# Altium PCB Capybara.PcbDoc (part 5 of 5)
Units mil, origin at the board's own origin, x right, y up, seen from the top; angles counter-clockwise.
Board outline 2270 x 2270 mil, 4 copper layers (Top Layer, GND, Signal, Bottom Layer), stack 61.8 mil thick; 394 components, 234 nets, 1155 pads, 211 vias.
Unrouted connection lines stored in the file: 4.
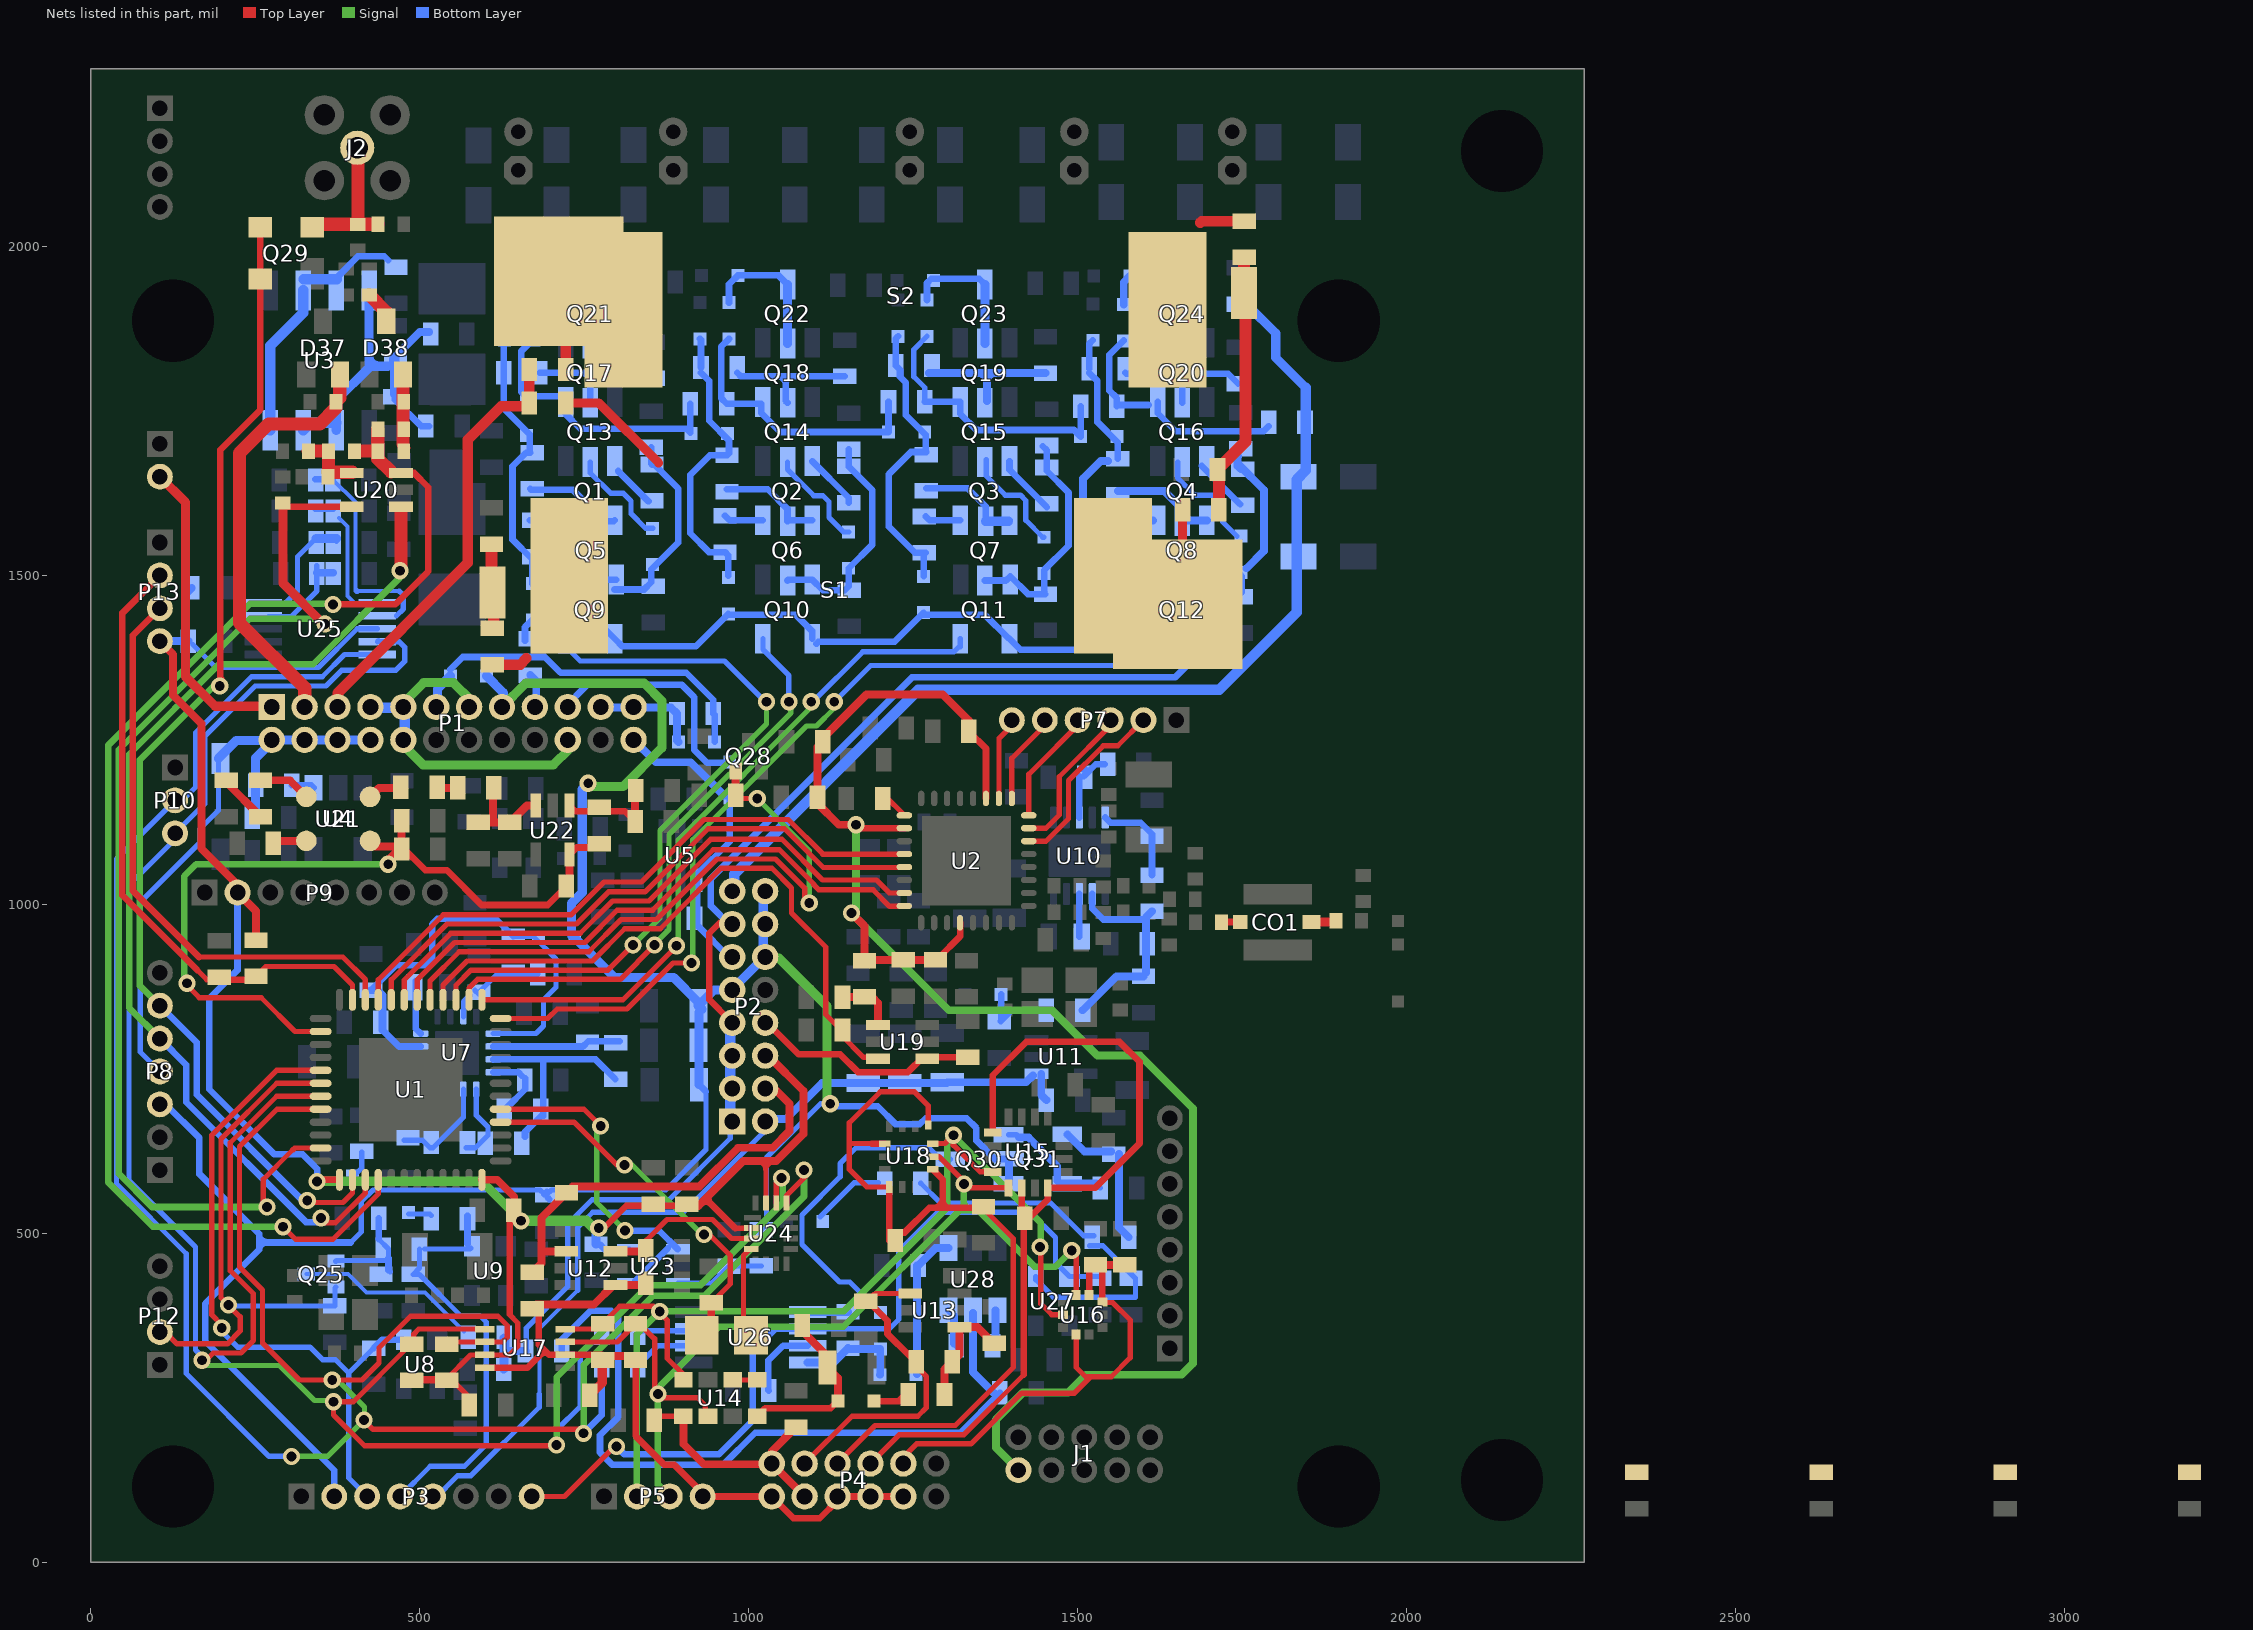
[diagram p5: the nets of this part, all layers, seen from the top]

## Via types
v1: diameter 26, hole 15, Top Layer to Bottom Layer, tented both sides, 209 vias
v2: diameter 26, hole 15, Top Layer to Bottom Layer, tented bottom, 2 vias

## Nets (pads, with @x,y where several pads share a name; then routed paths per layer and width w, separated by ;. In a path a pad name is that pad's centre, name@x,y a point inside that pad or via, vN(x,y) a via of type N, cw(c..) or ccw(c..) an arc to the next point about the centre after c; other vN are vias at no path point) (continued)
NetC97_1: C97.1 C98.1 D38.2 R100.2 | length 112.5
  Top Layer w10.42: R100.2@475.69,1689 R100.2@480.59,1693.91
  Top Layer w20.2: R100.2@474.59,1700.09 D38.2@474.59,1805.65
NetC99_2: C99.2 D38.3 | length 60.7
  Top Layer w10.42: D38.3@455,1884.35 D38.3@455,1894.31
  Top Layer w20.2: C99.2@423,1926.31 449,1900.31 D38.3@449,1886.35
NetC101_1: C101.1 R103.1 R104.2 U22.3 | length 139.2
  Top Layer w12: R103.1@589,1124.56 613,1124.56 ; R104.2@611.56,1165 611.56,1126 613,1124.56 ; U22.3@676.41,1150.4 662.84,1150.4 C101.1@637,1124.56 613,1124.56
NetC103_1: C103.1 U21.4 | length 52.6
  Top Layer w12: U21.4@424.43,1163.46 437.96,1177 C103.1@471.44,1177
NetC103_2: C103.2 R104.1 | length 29.9
  Top Layer w12: C103.2@526.56,1177 R104.1@556.44,1177
NetC106_2: C106.2 R105.1 | length 73.5
  Top Layer w12: C106.2@206,1185.44 R105.1@258,1133.44
NetC107_2: C107.2 R106.1 R107.2 U22.1 | length 157.4
  Top Layer w10: U22.1@727.59,1150.4 736.43,1141.56 811.88,1141.56 R107.2@827.44,1126 ; C107.2@827.44,1172 C107.2@828.44,1173
  Top Layer w12: R107.2@827.44,1126 C107.2@827.44,1172
NetC116_2: C116.2 Q31.1 R124.2 | length 209.9
  Bottom Layer w12: Q31.1@1484.29,650.4 1510.13,624.56 C116.2@1551,624.56 ; C116.2@1563,620.44 1563,508.56 R124.2@1577.56,494
NetC119_1: C119.1 U28.4 | length 52.9
  Bottom Layer w12: C119.1@1375.4,330.09 U28.4@1375.4,383
NetC119_2: C119.2 U28.6 | length 58.7
  Bottom Layer w10: U28.6@1303.6,383 U28.6@1312,374.6 ; C119.2@1312,332.69 C119.2@1315.44,329.24
  Bottom Layer w12: C119.2@1312,332.69 U28.6@1312,374.6
NetC120_2: C120.2 D40.1 U28.1 | length 223.4
  Bottom Layer w8: D40.1@1254.56,285 D40.1@1255.56,286
  Bottom Layer w12: D40.1@1255.56,286 C120.2@1255.56,451 ; C120.2@1257.56,451 1284.05,477.49 U28.1@1303.6,477.49
NetC121_2: C121.2 R130.2 U28.5 | length 1147.1
  Bottom Layer w8: C121.2@1372.56,257.44 C121.2@1381.88,257.44
  Bottom Layer w10: R130.2@715.8,321 715.8,338.8 759,382 791,382 802,371 802,221 774,193 774,167 793,148 961,148 1010,197 1321.44,197 C121.2@1381.88,257.44
  Bottom Layer w12: U28.5@1341,379 1341,289 C121.2@1372.56,257.44
NetCO1_1: CO1.1 R99.1 | length 37.1
  Top Layer w14: CO1.1@1855.23,973 R99.1@1892.31,973
NetCO1_2: CO1.2 L6.2 | length 28.3
  Top Layer w10.42: L6.2@1718.69,973 CO1.2@1746.96,973
NetD5_1: D5.1 Q1.3 | length 157.5
  Bottom Layer w8: Q1.3@759,1672.29 759,1656 790,1625 809.18,1625 821.18,1613 821.18,1593.82 843.44,1571.56 D5.1@854,1571.56
NetD6_1: D6.1 Q2.3 | length 157.7
  Bottom Layer w8: Q2.3@1059,1672.29 1059,1661 1099,1621 1113,1621 1122,1612 1122,1588 1144,1566 D6.1@1152,1566
NetD7_1: D7.1 Q4.3 | length 169.3
  Bottom Layer w8: Q4.3@1652,1672.29 1652,1648 1678,1622 1711,1622 1720,1613 1720,1581.56 D7.1@1742,1559.56
NetD8_1: D8.1 Q3.3 | length 169.4
  Bottom Layer w8: Q3.3@1361,1676.29 1361,1651 1390,1622 1413,1622 1421,1614 1421,1584 1447,1558 D8.1@1449,1558
NetD9_1: D9.1 D10.1 D17.2 Q17.2 R25.1 | length 429.5
  Bottom Layer w10: D9.1@663,1772.56 712.75,1772.56 Q17.2@721.6,1763.71 721.6,1745.4 744,1723 905.44,1723 911.44,1717 R25.1@911.44,1761 ; D9.1@666,1767.56 654,1779.56 654,1840.44 D17.2@672,1858.44
NetD11_1: D11.1 D18.2 Q18.2 R25.2 R26.1 | length 424.8
  Bottom Layer w10: D18.2@970,1859.44 958,1847.44 958,1769.56 R25.2@966.56,1761 1018.89,1761 1018.89,1747.11 1048,1718 D11.1@1212.44,1718 R26.1@1212.44,1764
NetD12_1: D12.1 D19.2 Q19.2 R26.2 R27.1 | length 430.1
  Bottom Layer w8: R26.2@1267.56,1764 1267.56,1785.44 1251,1802 1251,1843.44 D19.2@1271,1863.44
  Bottom Layer w10: R26.2@1267.56,1764 1267.85,1763.71 Q19.2@1321.6,1763.71 1321.6,1745.4 1346,1721 1494.44,1721 D12.1@1504.44,1711 R27.1@1504.44,1757
NetD17_1: D17.1 D21.1 Q17.3 Q21.3 | length 214.3
  Bottom Layer w10: D17.1@672,1913.56 672,1940.44 D21.1@685.56,1954 ; Q21.3@747.29,1954 Q21.3@759,1942.29
  Bottom Layer w14: D21.1@685.56,1954 Q21.3@747.29,1954 ; Q17.3@759,1852.29 Q21.3@759,1942.29
NetD18_1: D18.1 D22.1 Q18.3 Q22.3 | length 218.2
  Bottom Layer w10: D18.1@970,1914.56 970,1942.44 D22.1@983.56,1956 1045.29,1956 Q22.3@1059,1942.29
  Bottom Layer w14: Q18.3@1059,1852.29 Q22.3@1059,1942.29
NetD19_1: D19.1 D23.1 Q19.3 Q23.3 | length 210.2
  Bottom Layer w10: D19.1@1271,1918.56 1271,1944.44 1277.56,1951 1350.29,1951 Q23.3@1359,1942.29
  Bottom Layer w14: Q19.3@1359,1852.29 Q23.3@1359,1942.29
NetD20_1: D20.1 D24.1 Q20.3 Q24.3 | length 222.1
  Bottom Layer w12: D20.1@1570,1911.56 1570,1945.44 D24.1@1579.56,1955 1646.29,1955 Q24.3@1659,1942.29
  Bottom Layer w14: Q20.3@1659,1852.29 Q24.3@1659,1942.29
NetD20_2: D20.2 Q20.2 R27.2 R28.1 | length 361.8
  Bottom Layer w10: R27.2@1559.56,1757 1559.56,1769.44 1548,1781 1548,1835 D20.2@1570,1857 ; R27.2@1560.56,1759 1607.6,1759 ; Q20.2@1621.6,1763.71 1621.6,1746.4 1649,1719 1782.44,1719 R28.1@1790.44,1727
NetD32_1: D32.1 R74.1 | length 110.5
  Bottom Layer w8: D32.1@1108.56,525 1116,532.44 1116,532.53 1129.47,546 1129.56,546 1160.56,577 R74.1@1197.44,577
NetD33_1: D33.1 R73.1 | length 44.5
  Bottom Layer w8: D33.1@397.44,585 412,599.56 R73.1@412,623.44
NetD34_1: D34.1 R60.1 | length 35.5
  Bottom Layer w8: D34.1@483,529.44 515,529.44 R60.1@517.44,527
NetD35_1: D35.1 R84.1 R85.2 | length 116.1
  Bottom Layer w10: R85.2@1383,822.56 R85.2@1383.56,823.12 ; D35.1@1383.56,863 R85.2@1383.56,823.12 ; R84.1@1452.44,839 1399.44,839 R85.2@1383.56,823.12
NetD36_1: D36.1 R91.1 | length 57.7
  Top Layer w10: D36.1@1190.56,245 1228.44,245 R91.1@1242.44,259
NetD39_1: D39.1 Q30.3 | length 493.4
  Bottom Layer w8: D39.1@1200,379.56 1153.56,426 1138,426 1081,483 1081,528 1139,586 1139,606 1163,630 1274,630 1291.4,612.6 Q30.3@1306.42,612.6
NetFB2_2: FB2.2 U21.2 | length 51.5
  Top Layer w12: FB2.2@277.56,1093 281.09,1096.54 U21.2@327.57,1096.54
NetL1_2: L1.2 U7.16 | length 83.4
  Bottom Layer w10: L1.2@494,884 494,811 U7.16@501.35,803.65
NetL2_2: L2.2 U10.3 | length 64.9
  Bottom Layer w10: L2.2@1502.6,951 U10.3@1502.6,1015.87
NetL3_2: L3.2 U2.17 | length 42.9
  Top Layer w8: L3.2@1206.28,1165.72 U2.17@1236.61,1135.39
NetP7_2: P7.2 U2.6 | length 293.5
  Top Layer w8: U2.6@1425.59,1096.02 1451.81,1096.02 1486,1130.2 1486,1188 1539,1241 1561,1241 P7.2@1600,1280
  Top Layer w10: P7.2@1609,1272 P7.2@1609,1281
NetP7_3: P7.3 U2.7 | length 235.9
  Top Layer w8: U2.7@1425.59,1115.7 1451.7,1115.7 1472,1136 1472,1194 P7.3@1559,1281
NetP7_4: P7.4 U2.8 | length 180.2
  Top Layer w8: U2.8@1425.59,1135.39 1425.59,1197.59 P7.4@1509,1281
NetP7_5: P7.5 U2.9 | length 144.5
  Top Layer w8: U2.9@1400,1160.98 1400,1222 P7.5@1459,1281
NetP7_6: P7.6 U2.10 | length 131.9
  Top Layer w8: U2.10@1380.31,1160.98 1380.31,1252.31 P7.6@1409,1281
NetQ1_1: Q1.1 Q5.3 R5.1 | length 160.9
  Bottom Layer w10: R5.1@668,1631.44 669.44,1630 733,1630 761,1602 Q5.3@761,1582.29 794.98,1582.29 Q1.1@796.4,1583.71
NetQ1_2: Q1.2 R1.1 | length 54.7
  Bottom Layer w10: R1.1@667,1583.56 721.45,1583.56 Q1.2@721.6,1583.71
NetQ2_1: Q2.1 Q6.3 R6.1 | length 161.1
  Bottom Layer w10: R6.1@967,1631 1029,1631 1059,1601 Q6.3@1059,1582.29 1060.42,1583.71 Q2.1@1096.4,1583.71
NetQ2_2: Q2.2 R2.1 | length 60.4
  Bottom Layer w10: R2.1@964,1590.56 970.85,1583.71 Q2.2@1021.6,1583.71
NetQ3_1: Q3.1 Q7.3 R7.1 | length 161.1
  Bottom Layer w10: R7.1@1270,1632.44 1332.56,1632.44 1360,1605 Q7.3@1360,1582.29 ; Q3.1@1394.98,1582.29 Q3.1@1396.4,1583.71
  Bottom Layer w14: Q7.3@1360,1582.29 Q3.1@1394.98,1582.29
NetQ3_2: Q3.2 R3.1 | length 55
  Bottom Layer w10: R3.1@1269,1589.56 1274.85,1583.71 Q3.2@1321.6,1583.71
NetQ4_1: Q4.1 Q8.3 R8.1 | length 165.9
  Bottom Layer w12: R8.1@1561,1628 1632,1628 1659,1601 Q8.3@1659,1582.29 1660.42,1583.71 Q4.1@1696.4,1583.71
NetQ4_2: Q4.2 R4.1 | length 46.3
  Bottom Layer w12: R4.1@1568.56,1583 1613.89,1583 Q4.2@1614.6,1583.71
NetQ13_1: Q13.1 R9.1 | length 65.4
  Bottom Layer w10: Q13.1@801.4,1658.71 R9.1@847.67,1612.44
NetQ13_3: Q13.3 R13.1 R21.2 | length 265.1
  Bottom Layer w8: 743,1807 cw(c745,1792) 760,1794 cw(c772.5,1795.5) 771,1808
  Bottom Layer w10: R13.1@682.56,1808 846.44,1808 R21.2@855,1799.44 ; Q13.3@759,1762.29 759,1805 ; R21.2@851,1801.44 R21.2@853,1799.44
NetQ14_1: Q14.1 R10.1 | length 86.3
  Bottom Layer w10: Q14.1@1096.4,1673.71 1152,1618.11 R10.1@1152,1610.44
NetQ14_3: Q14.3 R14.1 R22.2 | length 253
  Bottom Layer w8: 1040,1802.44 cw(c1041.78,1788.22) 1056,1790 cw(c1070.72,1787.72) 1073,1802.44
  Bottom Layer w10: R14.1@982.56,1808 988.12,1802.44 1056,1802.44 ; Q14.3@1059,1762.29 1056,1765.29 1056,1802.44 ; R22.2@1146,1802.44 1056,1802.44
NetQ15_1: Q15.1 R11.1 | length 93.3
  Bottom Layer w10: Q15.1@1396.4,1673.71 1396.4,1660.48 R11.1@1453,1603.88
NetQ15_3: Q15.3 R15.1 R23.2 | length 277.1
  Bottom Layer w8: 1339,1806 cw(c1344.5,1788.5) 1362,1794 ; 1362,1793 cw(c1379.5,1789.5) 1383,1807
  Bottom Layer w12: R15.1@1274,1807.44 1360,1807.44 ; Q15.3@1362,1765 1362,1805.44 1360,1807.44 ; R23.2@1451,1807.44 1360,1807.44
NetQ16_1: Q16.1 R12.1 | length 82.6
  Bottom Layer w10: Q16.1@1688.4,1666.71 R12.1@1746.83,1608.28
NetQ16_3: Q16.3 R16.1 R24.2 | length 268.7
  Bottom Layer w8: 1643,1806 cw(c1645,1792) 1659,1794 cw(c1674,1791) 1677,1806
  Bottom Layer w10: R16.1@1572.56,1808 1574.12,1806.44 1659,1806.44 ; Q16.3@1659,1762.29 1659,1806.44 ; R24.2@1744,1791.44 1729,1806.44 1659,1806.44
NetQ25_1: Q25.1 R61.1 R63.2 R64.2 | length 170.5
  Bottom Layer w8: Q25.1@372.39,457.69 373.39,458.69 449.13,458.69 452.44,462 452.44,476 R63.2@437.56,490.88 ; R64.2@452.44,444.12 R64.2@455,441.56
  Bottom Layer w10: R63.2@437.56,490.88 R61.1@437.56,523 ; R64.2@452.44,444.12 R63.2@452.44,462
NetQ25_3: Q25.3 R59.1 | length 276.2
  Bottom Layer w6: Q25.3@327.5,438 391,438 419,410 508,410 R59.1@567.5,350.5
NetQ30_1: Q30.1 Q31.2 R125.2 | length 185.9
  Bottom Layer w8: Q30.1@1395,650 1407,650 Q30.1@1411,646 ; R125.2@1527.84,575.6 R125.2@1534.44,569
  Bottom Layer w12: Q30.1@1411,646 1425,646 1469,602 1469,580 1473.4,575.6 Q31.2@1484.29,575.6 R125.2@1527.84,575.6
NetR40_2: R40.2 U3.2 U3.3 U3.8 | length 379.7
  Bottom Layer w10: U3.3@374,1950.3 374,1953 406,1985 446,1985 R40.2@452,1979
  Bottom Layer w16: U3.8@273,1720.7 273,1849 323,1899 U3.2@323,1933.3 ; U3.2@324,1950.3 U3.3@374,1950.3
NetR41_1: R41.1 S2.1 | length 142
  Top Layer w16: S2.1@711,1952 S2.1@713.59,1949.41 ; S2.1@711.25,1947.06 721.56,1936.76 R41.1@721.56,1813
NetR42_1: R42.1 R45.2 S1.1 | length 335.4
  Top Layer w14: R42.1@721.56,1762 772,1762 863,1671 ; S1.1@1636.44,1453.23 1659.44,1476.23 R45.2@1659.44,1600
NetR43_1: R43.1 R45.1 R46.2 S2.2 | length 385.6
  Top Layer w18: R45.1@1714.56,1600 1714.56,1659 R46.2@1712.56,1661 1755,1703.44 S2.2@1755,1912.91 ; S2.2@1752.59,1929.32 1753,1929.73 R43.1@1753,1983.44
NetR43_2: R43.2 S2.3 | length 68.1
  Top Layer w16: 1686,2036 1688.56,2038.56 R43.2@1753,2038.56
NetR44_1: R44.1 R47.2 S1.2 | length 129.4
  Top Layer w18: R47.2@609,1547.44 609,1475.76 S1.2@610.85,1473.91 612.56,1472.2 R44.1@612.56,1419.56
NetR44_2: R44.2 S1.3 | length 56
  Top Layer w16: R44.2@610,1364.44 652.44,1364.44 662,1374
NetR48_2: R48.2 U4.1 | length 34.6
  Bottom Layer w10: R48.2@305.56,1181 334.84,1181 U4.1@338.6,1177.24
NetR55_1: R55.1 R57.2 R58.2 U7.3 | length 145.6
  Bottom Layer w8: U7.3@566.31,829.24 566.31,852.31 R55.1@576,862 ; R55.1@584,869.31 R55.1@589.63,863.69 ; R55.1@590,866.44 615,891.44 676.88,891.44 R57.2@679.44,894
NetR66_1: R66.1 R68.1 R70.1 U7.7 | length 328.7
  Bottom Layer w10: U7.7@611.63,764.24 U7.7@611.59,764.28 688,764.28 ; R70.1@660,647 660,653.94 684.06,678 687.56,678 687.56,763.83 688,764.28 ; R68.1@797,734.44 767.17,764.28 688,764.28
NetR66_2: R66.2 R67.1 U7.8 | length 102.1
  Bottom Layer w10: U7.8@611.59,744.59 649.97,744.59 R67.1@655,739.56 ; R66.2@632.44,691 660.44,719 R67.1@660.44,736
NetR68_2: R68.2 R69.1 U7.6 | length 195.7
  Bottom Layer w10: U7.6@611.87,784.24 U7.6@611.59,783.96 747.96,783.96 756,792 R68.2@803.56,792
NetR70_2: R70.2 R71.1 U7.9 | length 118.1
  Bottom Layer w8: R71.1@570.56,630 584.56,630 603.56,649 603.56,661.44 586,679 U7.9@586,719
NetR71_2: R71.2 R72.1 U7.10 | length 156.9
  Bottom Layer w8: R72.1@476,641.44 504,641.44 515.44,630 520,630 566.31,676.31 U7.10@566.31,719
NetR77_1: R77.1 R79.2 U10.8 | length 103.6
  Bottom Layer w10: U10.8@1502.6,1132.02 R77.1@1502.6,1195 ; R77.1@1509.56,1195 1527.56,1213 R79.2@1541.44,1213 ; R77.1@1509.56,1205 R77.1@1510.47,1205.91
NetR78_1: R78.1 R81.2 U10.10 | length 140.6
  Bottom Layer w10: U10.10@1541.97,1132.02 1549.98,1124 1595.87,1124 R81.2@1613.22,1106.66 ; R78.1@1613,1044.56 R81.2@1613,1103.44
NetR105_2: R105.2 U21.3 | length 80
  Top Layer w12: R105.2@258,1188.56 302.48,1188.56 U21.3@327.57,1163.46
NetR108_2: R108.2 R109.1 U23.3 | length 137.4
  Bottom Layer w8: U23.3@892.4,424.41 944.41,424.41 R109.1@970,450 970.44,450.44 R108.2@1019,450.44
NetR126_1: R126.1 U26.5 | length 61.3
  Bottom Layer w12: U26.5@1089.61,380.39 1150.63,380.39 R126.1@1150.8,380.56
NetR127_2: R127.2 U26.7 | length 115
  Bottom Layer w10: R127.2@1030.56,261 1030,261.56 1030,307 1052.2,329.2 U26.7@1089.61,329.2
NetR128_2: R128.2 U26.2 | length 97.4
  Bottom Layer w8: R128.2@831.56,298.8 861.96,329.2 U26.2@916.39,329.2
NetR129_2: R129.2 U26.3 | length 78.9
  Bottom Layer w8: R129.2@831.56,347.8 835.76,352 U26.3@908.76,352
NetU14_3: U14.3 U14.4 | length 37.4
  Top Layer w8: U14.3@975.47,277.13 U14.4@1012.87,277.13
OPEN_0: Q12.2 U1.12 | length 1372.9
  Top Layer w8: U1.12@623,826.43 694.43,826.43 708.97,840.97 814.77,840.97 884.8,911 912,911 912,906 v1@909,903
  Signal w8: v1@912,911 915,914 915,1098 1088,1271 1103,1271 1130,1298 v1(1130,1308)
  Bottom Layer w8: v1@1125,1310 v1@1128.54,1310 ; v1@1129.08,1310 v1@1128.54,1310 ; Q12.2@1621.6,1403.71 1621.6,1393.6 1591,1363 1185.54,1363 1130.54,1308 v1@1128.54,1310
  other v1: 913,911
OPEN_1: Q11.2 U1.13 | length 1077.6
  Top Layer w8: U1.13@594.46,854.97 808.97,854.97 888,934 v1@887,935
  Signal w8: v1(890,937) 893,940 893,1098 1095,1300 v1(1095,1308)
  Bottom Layer w8: v1@1096.24,1306.76 1173.47,1384 1312,1384 1321.6,1393.6 Q11.2@1321.6,1403.71 Q11.2@1321.6,1391.6 ; v1@1099,1311 1099,1302 v1@1100,1301
OPEN_2: Q10.2 U1.14 | length 903
  Top Layer w8: U1.14@574.77,854.97 574.77,872.77 588,886 805,886 v1(857,938)
  Signal w8: v1(857,938) 856,939 879,962 879,1106 1064,1291 v1@1064,1308
  Bottom Layer w8: Q10.2@1021.6,1396.4 Q10.2@1021.6,1403.71 1021.6,1387.4 1061,1348 v1(1061,1308)
OPEN_3: Q9.2 U1.15 | length 1146.6
  Top Layer w8: U1.15@555.09,854.97 555.09,877.09 578,900 786,900 v1(824,938) v1@833,938
  Signal w8: v1@824,929 v1@833,938 ; v1(824,938) 865,979 865,1112 1027,1274 v1(1027,1308)
  Bottom Layer w8: Q9.2@721.6,1403.71 721.6,1392.4 744,1370 963,1370 1027,1306 v1(1027,1308)
PHOTO_SENSE: Q27.2 R93.2 U1.4 | length 571.4
  Top Layer w8: U1.4@623,668.94 734.58,668.94 799.53,604 v1@805,604 ; v1@932,495 943,495 972,466 972,423 943.44,394.44 R93.2@943,394.44
  Top Layer w12: Q27.2@928.6,345 943,359.4 R93.2@943,394.44
  Signal w8: v1@806.5,605.5 821.5,605.5 v1@932,495
  other v1: 932,498 811,604
PHOTO_SW: Q27.1 U24.4 | length 141.8
  Top Layer w8: Q27.1@1003.4,345 992,356.4 992,466 1002.38,476.38 U24.4@1003.8,476.38
RAD_IO0: U1.19 U2.23 | length 912.9
  Top Layer w8: U1.19@476.35,854.97 476.35,885.15 547.2,956 744,956 793,1005 848.2,1005 942,1098.8 942.2,1099 1050.4,1099 1112.4,1037 1194,1037 1213.72,1017.28 U2.23@1236.61,1017.28
RAD_IO1: U1.18 U2.24 | length 889.1
  Top Layer w8: U1.18@496.03,854.97 496.03,885.03 553,942 751,942 800,991 854,991 946,1083 1046.6,1083 1099,1030.6 1099,1029.6 1106.6,1022 1189.2,1022 1214.2,997 1236.02,997 U2.24@1236.61,997.59
RAD_RST: Q28.1 R98.2 U1.17 | length 988.3
  Top Layer w8: U1.17@515.72,854.97 515.72,883.72 560,928 756.8,928 805.8,977 859.8,977 951.8,1069 1040.8,1069 1085,1024.8 1085,1006 1092,999 v1(1092,1002) ; R98.2@980,1166 985,1161 v1(1013,1161) ; Q28.1@980,1202.24 Q28.1@980.31,1202.56
  Top Layer w12: R98.2@980,1166 Q28.1@980,1202.24
  Signal w8: v1(1013,1161) 1092,1082 v1(1092,1002)
RAD_RX: U1.21 U2.20 | length 952.8
  Top Layer w8: U1.21@436.98,854.97 437,885.4 535.6,984 730,984 780,1034 837,1034 932,1129 1059.99,1129 1112.66,1076.33 U2.20@1236.61,1076.33
RAD_SW: R96.2 U1.16 U19.3 | length 961.8
  Top Layer w8: U1.16@535.4,854.97 535.4,877.4 572,914 762.6,914 811.6,963 865.6,963 957.6,1055 1035,1055 1065,1025 1065,987 1117,935 1117,832.56 R96.2@1140.56,809 ; R96.2@1141,801 1174.59,767.41 U19.3@1203.6,767.41
RAD_TX: U1.20 U2.21 | length 930.1
  Top Layer w8: U1.20@456.66,854.97 456.66,885.26 541.4,970 738,970 787,1019 842.4,1019 938.4,1115 1054.2,1115 1113.2,1056 1235.97,1056 U2.21@1236.61,1056.65
RF_ANT: C95.2 J2.1 L8.1 Q29.2 | length 220.5
  Top Layer w10.42: C95.2@436,2033.69 C95.2@436.31,2034
  Top Layer w20.2: Q29.2@336.37,2033.69 L8.1@406,2033.69 C95.2@436,2033.69 ; J2.1@405,2160 406,2159 L8.1@406,2040
RF_BITLINE_LPF: C100.1 R101.1 R102.1 U20.4 | length 101.4
  Top Layer w10.42: U20.4@397.19,1657 U20.4@398.6,1655.59
  Top Layer w20.2: C100.1@330.69,1689 R101.1@361.31,1689 361.31,1657.63 360.69,1657 U20.4@397.19,1657
RF_RX: P8.5 U1.39 U20.1 | length 1582.6
  Top Layer w8: v1@352,517 353,516 372,516 417.29,561.29 U1.39@417.29,581.35
  Top Layer w20.2: v1(470,1507) 471.4,1508.4 471.4,1596
  Signal w8: v1@344,517 v1@352,517
  Signal w10: P8.5@105,796 58.31,842.69 58.31,1228.26 195.06,1365 338,1365 470,1497 v1(470,1507)
  Bottom Layer w10: P8.5@105,796 145,756 145,699.06 327.06,517 v1@352,517
  other v1: 350,523
RF_RX_BITLINE: C97.2 R100.1 R101.2 U1.40 U20.3 | length 2044.1
  Top Layer w8: v1(292,510) 311,491 368,491 436.98,559.98 U1.40@436.98,581.35
  Top Layer w10: v1(368,1456) 463,1456 513,1506 513,1634 491.41,1655.59 U20.3@471.4,1655.59
  Top Layer w20.2: R101.2@400.69,1689 R100.1@436.31,1689 ; C97.2@436.31,1722 R100.1@436.31,1689 ; U20.3@456.37,1657.37 436.31,1677.43 R100.1@436.31,1689
  Signal w10: v1(292,510) 94,510 26.31,577.69 26.31,1241.51 241.8,1457 v1@368,1457
RF_RX_EN: C96.1 U1.35 U20.5 | length 1753.2
  Top Layer w8: v1@262,540 262,582 307,627 307.53,627 310.1,629.57 U1.35@349.38,629.57
  Top Layer w10.42: C96.1@292.91,1604.41 U20.5@396.6,1604.41 U20.5@398.6,1604.41
  Top Layer w14: C96.1@292,1610.31 292,1488 v1@355,1425
  Signal w10: v1(268,540) 93,540 42.31,590.69 42.31,1234.88 241.43,1434 v1@356,1434
  other v1: 356,1426
RF_TX: P8.6 Q29.3 Q29.4 U1.38 | length 1757.7
  Top Layer w8: v1@331,547 383.2,547 397.61,561.41 U1.38@397.61,581.35
  Top Layer w10: v1@198,1343 196.9,1344.1 196.9,1690.9 257.63,1751.63 Q29.3@257.63,2029.37
  Signal w10: P8.6@105,846 74.31,876.69 74.31,1219.43 190.88,1336 v1@197,1336
  Bottom Layer w10: P8.6@105,846 161,790 161,711 325,547 v1@331,547
  other v1: 329,550 196,1332
RST_AP: C114.1 P13.2 R114.1 U1.23 | length 948.2
  Top Layer w8: 161.85,900 176.41,885.44 C114.1@189,885.44 ; R114.1@251,890.44 266,905.44 369.56,905.44 397.61,877.39 U1.23@397.61,854.97
  Top Layer w10: P13.2@105,1500 48,1443 48,1013.85 161.85,900 ; C114.1@189,885.44 245,885.44 R114.1@246,884.44
S_SCL: P5.3 R94.1 U14.7 U15.1 U16.2 U17.3 U18.13 | length 1571.9
  Top Layer w8: U17.3@721.02,334.84 800.28,334.84 831,365.56 857,339.56 v1@857,250 ; v1@862,250 922,250 934,238 U14.7@934,228 ; U18.13@1279.63,616.71 1289.29,616.71 1327,579 v1(1327,575) 1332.94,569.06 U15.1@1395,569.06 ; v1(1491,474) 1497.76,467.24 U16.2@1497.76,406.22
  Signal w8: 1322,537.37 ccw(c1317.33,544.11) 1325.53,544.02
  Signal w10: P5.3@880,100 862,118 v1(862,256) 862,265 955,358 1143.79,358 1321.23,535.44 1327,535.44 ; 1327,549 ccw(c1340.28,548.72) 1340,535.44 ; v1(1327,575) 1327,535.44 ; v1(1491,474) 1466,449 1435.06,449 1348.62,535.44 1327,535.44
S_SDA: P5.2 R95.1 U14.1 U15.16 U16.4 U17.4 U18.14 | length 1665.9
  Top Layer w8: U17.4@720.5,354 U17.4@721.02,354.53 766.97,354.53 778,365.56 780.56,365.56 804,389 855,389 876,368 876,310 899.87,286.13 U14.1@900.67,286.13 ; U18.14@1279.63,636.39 1298.39,636.39 v1(1311,649) 1311,634 1351.53,593.47 U15.16@1371,593.47 ; v1@1443.7,475.3 1443,474.6 1444,473.6 1444,393 1460.8,376.2 U16.4@1477.58,376.2
  Signal w8: P5.2@830,105 P5.2@835,100
  Signal w10: P5.2@830,105 830,346.57 v1(864.72,381.28) 1144.28,381.28 1302,539 1302,640 v1(1311,649) 1443.7,516.3 v1@1443.7,475.3
  other v1: 1442.7,479.3
SC_COM: R34.2 R35.1 R38.2 R39.1 U3.4 U3.6 U3.7 | length 548.7
  Bottom Layer w8: 425,1835 ccw(c439,1835) 439,1821
  Bottom Layer w10: R39.1@462,1775.56 R39.1@462,1771.56 462,1767 502,1727 R35.1@514.44,1727
  Bottom Layer w12: R38.2@459,1824.44 459,1829 500,1870 R34.2@514.44,1870
  Bottom Layer w14: U3.6@373,1732 U3.6@373,1720.7 373,1766 423,1816 ; U3.4@423,1926.3 423,1818 R38.2@451.44,1818 ; R39.1@462,1775.56 R38.2@462,1829
  Bottom Layer w16: U3.7@323,1720.7 334.3,1732 U3.6@373,1732
SCL: P10.2 R110.1 R128.1 U1.32 U17.6 U24.13 U25.10 | length 3951.7
  Top Layer w8: U1.32@349.38,688.63 282.83,688.63 226,631.8 226,449 261,414 261,333.47 317.47,277 v1(367,277) 412.2,277 438,302.8 438,326 486,374 618.97,374 633,359.97 633,342 625.84,334.84 U17.6@598.98,334.84 543.28,334.84 R110.1@541,332.56 ; v1(415,216) 429,202 v1@749,202 ; U24.13@1057.62,546 1057.62,557.62 v1@1085,585
  Signal w8: v1(305,161) 360,161 v1(415,216) 416,217 416,236 375,277 v1(367,277)
  Signal w10: v1(749,196) 749,299.51 854.78,405.28 933.28,405.28 1084,556 v1@1084,599
  Bottom Layer w8: v1(305,161) 271,161 145,287 145,469 39,575 39,1069 P10.2@128,1158 139,1158 159,1178 159,1260.8 244.2,1346 351.8,1346 385.43,1379.63 U25.10@435.61,1379.63
  Bottom Layer w10: v1(749,196) 776.44,223.44 R128.1@776.44,298.8
  other v1: 1084,596
SDA: P10.3 R111.1 R129.1 U1.31 U17.5 U24.14 U25.9 | length 3769.5
  Top Layer w8: v1@167,305 167,299 186,318 228,318 247,337 247,408.2 212,443.2 212,637.6 282.71,708.31 U1.31@349.38,708.31 ; R111.1@481,326 399,244 v1(369,244) 369,224 416,177 707,177 v1(708,178) ; R111.1@491,330.56 491,347 498.53,354.53 U17.5@598.98,354.53 ; U24.14@1041.87,546 1041.87,576.87 v1@1052,587
  Signal w8: v1@169,299 287,299 340,246 367,246 v1(369,244)
  Signal w10: v1(708,178) 708,281.14 848.15,421.28 926.66,421.28 1052,546.63 v1@1052,587
  Bottom Layer w8: v1@169,299 169,312.57 159,322.57 159,479 58,580 58,1029 128,1099 P10.3@128,1108 173,1153 173,1255 250,1332 357.6,1332 381.6,1356 464,1356 477,1369 477,1391 468.69,1399.31 U25.9@435.61,1399.31 U25.9@437.3,1401 ; v1(708,178) 708,201 744,237 744,315.16 776.44,347.6 R129.1@776.44,347.8
  other v1: 169,307 1050,584
SENSE_SW: R90.2 U12.3 U24.3 | length 249.1
  Top Layer w8: R90.2@843.85,472.59 844.44,472 844.44,489.44 876,521 945,521 973.87,492.13 U24.3@1003.8,492.13
  Top Layer w12: U12.3@797.4,472.59 R90.2@843.85,472.59
SUPPLY_BQ: D26.2 D29.1 P1.11 R50.1 | length 555.3
  Bottom Layer w10: 546.44,1357 565.44,1376 690,1376 714,1352 905,1352 946,1311 946,1290.12 R50.1@946.12,1290 948.12,1288 D29.1@948.12,1247
  Bottom Layer w14: P1.11@527,1299 527,1327.56 D26.2@546.44,1347
SUPPLY_BQ_IN: D29.2 P1.21 P1.23 R50.2 | length 172.9
  Bottom Layer w10: P1.23@831,1305 P1.23@836,1300
  Bottom Layer w12: P1.21@777,1299 827,1299 882,1299 R50.2@891,1290 891,1249 D29.2@893,1247 ; P1.21@783,1303 P1.21@786,1300
SUPPLY_HRV: D27.1 P1.19 | length 368.8
  Bottom Layer w10: P1.19@719,1298 755,1334 898,1334 917,1315 917,1235 937,1215 967.44,1215 D27.1@974,1221.56
TEST_AP: P13.3 U1.22 | length 886.4
  Top Layer w8: 164.48,920 278,920 383,920 417.29,885.71 U1.22@417.29,854.97
  Top Layer w10: P13.3@105,1450 64,1409 64,1020.48 164.48,920
VAR_THR: C118.2 P3.8 U26.6 U27.2 | length 1243.5
  Top Layer w8: P3.8@670,100 720,100 796,176 v1(799,176)
  Bottom Layer w8: v1@802,180 v1@802.5,179.5 ; U26.6@1089.61,354.8 1089.82,355 1214,355 1228,369 1228,473 1287,532 1428,532 1466.4,493.6 1466.4,455.59 U27.2@1487.59,434.4 1535.16,434.4 C118.2@1538,431.56
  Bottom Layer w10: v1(799,176) 811,164 954.37,164 1006,215.63 1006,320 1040.8,354.8 U26.6@1089.61,354.8
VAR_THR_EN: C117.2 R74.2 R124.1 U27.1 | length 582.6
  Bottom Layer w8: R74.2@1261.56,576 1291.56,546 1459,546 1508.72,496.28 R124.1@1524.72,496.28 ; U27.1@1436.41,434.4 1436.41,429.59 1463,403 1588,403 1588,431.56 1538.56,481 R124.1@1518,481
VB1_DIV: R116.1 R120.1 U25.4 | length 152.6
  Bottom Layer w8: U25.4@270.39,1437.69 304.69,1437.69 343.56,1476.56 R120.1@343.56,1515
  Bottom Layer w12: R120.1@343.56,1504 R116.1@368.44,1504
VB2_DIV: R117.1 R121.1 U25.5 | length 180.5
  Bottom Layer w6: R117.1@373.44,1550.56 R117.1@373.44,1556
  Bottom Layer w8: U25.5@270.39,1457.37 295.37,1457.37 314,1476 314,1528.44 R121.1@342.56,1557
  Bottom Layer w14: R121.1@342.56,1556 R117.1@373.44,1556
VB3_DIV: R118.1 R122.1 U25.6 | length 200.3
  Bottom Layer w6: R118.1@377,1587 390,1574 390,1469 400.63,1458.37 U25.6@435.61,1458.37
  Bottom Layer w10: R122.1@341.56,1601 R118.1@368.44,1601
VB4_DIV: R119.1 R123.1 U25.7 | length 323.2
  Bottom Layer w6: R119.1@367.44,1646 402,1611.44 402,1478 404,1476 469,1476
  Bottom Layer w8: 403,1478 ccw(c405,1478) 405,1476 ; 464.69,1438.69 475,1449 475,1470 469,1476
  Bottom Layer w10: R123.1@341.56,1646 R119.1@367.44,1646
VBANK: C29.2 C30.2 C31.2 D25.1 D26.1 P1.15 P2.9 P2.12 P2.14 P2.16 P3.2 P8.3 Q30.2 Q31.3 R62.1 R108.1 | length 3948.6
  Signal w14: P1.15@625,1300 661,1336 841,1336 868,1309 868,1238 809,1179 v1@763,1179 ; P2.12@1022,918 1046,918 1119,845 v1@1119,697
  Bottom Layer w8: 255.79,474 cw(c271.39,470.39) 275,486 ; 255.79,497 ccw(c269.39,501.61) 269.99,487.25 ; 395,486 411,502 411,548 429,566 682.56,566 689.28,559.28 R62.1@695,553.56 ; R62.1@693,558.56 700.44,566 873.8,566 935,627.2 C31.2@935,715.4 ; R108.1@1019,505.56 1027,513.56 1027,615 1109,697 v1@1119,697
  Bottom Layer w10: P8.3@105,696 114,696 165,645 165,590 255.79,499.21 255.79,475 174,393.21 174,335.94 370,139.94 P3.2@370,100 ; 255.79,486 395,486 ; R62.1@689.28,559.28 R62.1@693,563 ; R62.1@695,553.56 696.78,551.78 R62.1@697,552 ; C31.2@924.4,726 C31.2@935,715.4 ; C29.2@924.4,835.8 C29.2@929,840.4 ; P2.9@970,870 P2.9@972,872 ; v1@1119,693 1196,693 1223,666 1260,666 1269,675 1331,675 1346,660 1346,641 1374,613 Q31.3@1395.71,613 ; Q30.2@1395,575.2 Q30.2@1395.71,575.91
  Bottom Layer w12: Q30.2@1395.71,575.91 Q31.3@1395.71,613
  Bottom Layer w14: D26.1@601.56,1347 627,1321.56 P1.15@627,1299 ; D25.1@730.56,953 730.56,1001.56 747,1018 747,1175 v1(756,1184) ; D25.1@735.56,949 795.56,889 885.77,889 923.4,851.37 C29.2@923.4,846 ; C31.2@924.4,726 C29.2@924.4,835.8 ; C29.2@929,840.4 C29.2@923.4,846 ; P2.9@972,868 P2.12@1022,918 ; P2.9@972,870 970,870 947.4,870 C29.2@923.4,846 ; P2.12@1022,920 P2.16@1022,1020
  other v1: 1124,697
VBANK_DIV_IN: U1.5 U23.1 U23.4 | length 504
  Top Layer w8: U1.5@623,688.63 749.37,688.63 v1(775,663)
  Signal w8: v1@769,660 769,547 v1(812,504)
  Bottom Layer w10: v1(812,504) 863.99,504 U23.1@892.4,475.59 ; U23.4@827.65,422 827.65,427.65 U23.1@877,477
VBANK_OK: P12.2 Q25.2 R65.2 U1.30 | length 828.8
  Top Layer w8: P12.2@105,350 113,350 131,332 207.53,332 227,351.47 227,373 v1(209,391) 198,402 198,643.4 282.6,728 U1.30@349.38,728
  Bottom Layer w8: v1@218,391 v1(209,391) 210.44,389.56 R65.2@371,389.56 371,416.93 Q25.2@372.39,418.31
VBOOST: C46.2 R76.1 R78.2 R84.2 U10.2 | length 322.6
  Bottom Layer w10: U10.2@1522.28,1015.87 1522.28,993.72 1539,977 1600.56,977 R78.2@1603.56,980
  Bottom Layer w12: R84.2@1507.56,839 1559.12,890.56 R76.1@1600,890.56 ; R76.1@1603.56,896.12 1603.56,980 R78.2@1613,989.44
VBOOST_OK: C39.2 P3.3 U1.29 U8.1 | length 1032.5
  Top Layer w8: v1@199,351 199,361 184,376 184,649.2 282.48,747.69 U1.29@349.38,747.69
  Bottom Layer w8: v1@199,351 223,327 333,327 352,308 371.56,308 392,287.56 ; P3.3@420,100 392,128 392,287.56 ; C39.2@430,325.56 392,287.56
  Bottom Layer w10: C39.2@430,325.56 442.84,338.4 U8.1@474.41,338.4
  other v1: 199,356
VCAP: C1.1 C2.1 P2.15 R28.2 R32.2 | length 1558.7
  Bottom Layer w14: R32.2@1759,1910 1801,1868 1801,1831 1846.56,1785.44
  Bottom Layer w16: P2.15@978,1015 978,1046 1258,1326 1715,1326 1832.72,1443.72 1832.72,1645.72 1846.56,1659.56 1846.56,1785.44
VCAP_IN: C28.2 D27.2 P1.24 P2.11 U5.1 | length 466.2
  Bottom Layer w10: D27.2@971.2,1161.44 971.2,1095.2 921.59,1045.59 U5.1@921.59,1036.6 921.59,968.41 P2.11@972,918
  Bottom Layer w12: P1.24@822,1253 859,1216 911.96,1216 962.58,1165.38 D27.2@967,1165.38
VCAP_OK: C43.2 P3.4 R60.2 R63.1 U9.1 | length 646.4
  Bottom Layer w8: P3.4@470,100 516,146 568,146 601,179 601,365 592,374 563,374 499.44,437.56 C43.2@490,437.56 499.56,447.12 R63.1@499.56,476 ; R63.1@507.56,476 576.01,476 U9.1@577.41,477.4
  Bottom Layer w10: U9.1@572.56,484.25 R60.2@572.56,527
VDD: C51.2 C52.2 C53.2 P2.2 P3.5 R75.2 U11.1 | length 1350.8
  Bottom Layer w6: 681.67,255.67 682.24,256.24 682.24,355.24 740,413
  Bottom Layer w8: P3.5@523,97 557.68,131.68 577.68,131.68 681.67,235.67 681.67,255.67 ; 740,413 740,509 763,532 901,532 1022,653 P2.2@1022,668
  Bottom Layer w12: P2.2@1022,674 1057,674 1111.6,728.6 C51.2@1174,728.6 C53.2@1237,728.6 1301,728.6 C52.2@1302,729.6 1421.6,729.6 U11.1@1432,740 ; U11.1@1444.6,742.41 1444.6,710.31 R75.2@1452.44,702.47
VDD_APDS: C59.2 P4.9 P4.12 R92.2 U14.8 | length 364.8
  Top Layer w8: C59.2@866.54,222.02 U14.8@900.67,222.02
  Top Layer w12: U14.8@900.67,222.02 900.67,179.98 931.64,149 P4.12@1035,149 ; R92.2@1072,205.44 1035,168.44 P4.12@1035,150 P4.9@1085,100
VDD_APDS_LED: C60.2 C61.1 D36.2 U14.5 | length 269.5
  Top Layer w10: U14.5@1012.87,222.02 1024.86,234 1124.44,234 D36.2@1135.44,245 ; C60.2@1081.44,351.56 C60.2@1081.44,360 ; C61.1@1116,317 1116,309 1119.6,305.4 C61.1@1119.6,296
  Top Layer w12: C60.2@1081.44,351.56 C61.1@1116,317 ; C61.1@1119.6,296 1135.44,280.16 D36.2@1135.44,245
VDD_APDS_LED_IN: C58.2 R88.2 R91.2 U13.1 | length 172.2
  Top Layer w12: R91.2@1297.56,255 1297.56,293 R88.2@1309.56,305 1320.4,315.84 U13.1@1320.4,357.41 1347.59,357.41 C58.2@1371,334
VDD_APDS_LED_SUP: C55.2 P4.10 R88.1 U13.4 | length 486.9
  Top Layer w8: P4.10@1085,150 1157,222 1257,222 1270,235 1270,282.44 1255.44,297 R88.1@1255.44,313 ; C55.2@1190,405.56 1193.03,408.59 U13.4@1245.6,408.59
  Top Layer w10: C55.2@1190,405.56 1190,388 1211,367 1211,347 1245,313 R88.1@1255.44,313
VDD_HMC: C64.1 P4.6 U15.2 U15.4 U15.13 | length 1276.8
  Top Layer w8: P4.6@1185,150 1229,194 1327,194 1418,285
  Top Layer w10: U15.13@1371,653 1371,740.24 1421.76,791 1563.74,791 1594,760.74 1594,636.56 1526.5,569.06 U15.4@1454.53,569.06 1454.53,551.21 C64.1@1430,526.69 ; U15.2@1415,569.06 1415,540 1428.31,526.69 1418,526.69 1418,285
VDD_LOAD: D1.1 D2.1 D3.1 D4.1 JU2.1 JU2.2 P1.17 P2.1 P2.3 P2.5 P2.7 P2.13 Q9.1 Q10.1 Q11.1 Q12.1 R56.2 R59.2 R130.1 | length 3262.6
  Top Layer w10: P2.7@972,822 972,823.21 940,855.21 940,956 956,972 P2.13@972,972
  Bottom Layer w8: R130.1@660.69,321 662,322.31 662,356 725,419 725,514 762,551 878.6,551 972,644.4 P2.1@972,670
  Bottom Layer w10: JU2.2@660,1400.56 660,1421.44 D1.1@671,1432.44 678.56,1440 760.11,1440 Q9.1@796.4,1403.71 808.11,1392 919.56,1392 D2.1@969,1441.44 ; D2.1@969,1440 1072,1440 1096.4,1415.6 Q10.1@1096.4,1403.71 ; P2.13@972,968 942.5,997.5 942.5,1039.5 1248,1345 1648,1345 1696.4,1393.4 Q12.1@1696.4,1403.71 ; Q10.1@1103,1396 1106,1399 1221.56,1399 D3.1@1266,1443.44 ; D3.1@1266,1440 1359.31,1440 Q11.1@1394,1405.31 ; Q11.1@1396.4,1403.71 1413.11,1387 1505.6,1387 D4.1@1561,1442.4 ; D4.1@1561,1440 1664,1440 Q12.1@1701,1403
  Bottom Layer w12: R130.1@660.69,321 630.56,321 ; JU2.1@668,1348.44 677,1339.44 P1.17@677,1299 ; 630.56,321 630.56,340 R59.2@628.56,342 627.56,341 R56.2@627.56,293 628.56,294 628.56,319 630.56,321
  Bottom Layer w16: P2.1@972,672 P2.7@972,822
VDD_LPS: C62.1 C63.1 P4.4 U16.1 U16.6 U16.10 | length 749
  Top Layer w8: P4.4@1235,150 1235,160 1255,180 1337.8,180 1414.8,257 1495,257 1518,280 1518,282 ; U16.6@1497.76,346.18 1497.76,296.24 1512,282 1518,282 ; U16.10@1537.62,395.89 1538.5,395 1553.2,395 1580,368.2 1580,311 1551,282 1518,282
  Top Layer w10: U16.1@1517.44,406.22 C63.1@1517.44,450.18 ; U16.10@1537.62,395.89 C63.1@1537.62,448
  Top Layer w12: C63.1@1529.2,451.94 C62.1@1576.3,451.94
VDD_LSM: C67.1 C68.1 P4.8 U18.1 U18.5 U18.8 U18.12 | length 1302.3
  Top Layer w8: P4.8@1132,161 1145,161 1192,208 1314,208 1402,296 1402,492 C68.1@1355.22,538.78 ; 1153,636.39 1187.39,636.39 ; U18.8@1213.69,570.45 1179.55,570.45 1153,597 1153,668 1200,715 1252,715 1272.74,694.26 U18.1@1272.74,664.94 ; 1274.78,538.78 ccw(c1277.78,556) 1295,553 ccw(c1308.11,551.89) 1307,538.78
  Top Layer w10: 1187.39,636.39 U18.5@1206.8,636.39 ; C67.1@1213.69,489 U18.8@1213.69,570.45 ; C67.1@1224.44,501 1237,501 1274.78,538.78 1295,538.78 ; U18.12@1279.63,597.02 1295,581.65 1295,538.78 ; C68.1@1355.22,538.78 1295,538.78
VDD_MCU: C70.2 C112.1 C113.1 C115.2 P2.6 P9.2 P13.4 R110.2 R111.2 R112.2 R113.2 R114.2 R115.2 U1.37 U1.48 U17.7 U23.5 U24.2 U24.15 U25.8 | length 3339.2
  Top Layer w6: P2.6@1015,772 P2.6@1016,771
  Top Layer w8: R111.2@490,277.44 R111.2@492,275.44 ; R110.2@540.22,278.22 577.16,315.16 U17.7@598.98,315.16 636.16,315.16 649,328 649,363.77 637,375.77 ; R110.2@550,276 C70.2@572,254 ; 637,411 638,410 ; R112.2@923.44,541.44 cw(c934.5,532.94) 943,544 cw(c952.5,552.5) 944,562 ; 979.34,507.87 U24.2@1003.8,507.87 ; 1014,609 cw(c1014,597) 1026,597 cw(c1040.34,595.5) 1041.84,609.84 ; U24.15@1026.13,546 1026.13,607.97
  Top Layer w10: v1(344,579) 346.35,581.35 U1.37@377.92,581.35 ; 637,377.19 637,411 637,526.44 C113.1@643.56,533 ; v1@776,504 814,542 R112.2@902,542 ; 935.61,551.61 979.34,507.87
  Top Layer w12: P13.4@105,1400 125,1380 125,1318 168,1275 168,1085 223,1030 P9.2@223,1018 251,990 R114.2@251,945.56 ; R111.2@490,277.44 R110.2@541,277.44 ; U1.48@594.46,581.35 617.65,581.35 643.56,555.44 C113.1@643.56,533 ; R112.2@902,541.44 923.44,541.44 991.84,609.84 1041.84,609.84 1083,651 1083,716.64 1031.64,768 P2.6@1022,768
  Signal w14: v1(344,579) 594,579 v1(654,519)
  Signal w16: v1(654,519) 753,519 v1@768,504
  Bottom Layer w8: R115.2@155.44,1394.56 190,1360 346,1360 405,1419 U25.8@435.61,1419
  Bottom Layer w10: P9.2@223,1018 223,900 180,857 180,719 279,620 322,620 344,598 v1(344,579) ; C112.1@773,483.56 781.97,474.59 U23.5@818.6,474.59
  Bottom Layer w12: P13.4@106,1399 P13.4@105,1400 R115.2@148.44,1400 144,1404.44 144,1471.56 C115.2@153.44,1481
  Bottom Layer w14: C112.1@768,483.56 768,504 v1(772,508)
VDD_MIC: C102.2 C104.2 C105.2 R106.2 U1.26 U21.1 U22.5 | length 1233.8
  Top Layer w8: v1@145,878 165,858 259,858 310.26,806.74 U1.26@349.38,806.74
  Top Layer w10: C105.2@472.44,1088 508.44,1052 541,1052 594,999 694.56,999 C102.2@722.56,1027 ; U22.5@727.59,1075.6 738.43,1086.44 R106.2@777,1086.44
  Top Layer w12: U21.1@424.43,1096.54 432.96,1088 C105.2@472.44,1088 ; v1@447,1061 446.56,1061 446,1061.56 C105.2@472.44,1088 ; C104.2@472.44,1132 C105.2@472.44,1088 ; C102.2@727.59,1032.03 U22.5@727.59,1075.6
  Signal w10: v1@145,878 142,881 142,1043 160,1061 438,1061
  other v1: 146,880 452,1061
Vdd_pot: D39.2 D40.2 R126.2 U26.8 | length 159.5
  Bottom Layer w12: U26.8@1089.61,303.61 1128.98,303.61 R126.2@1150.8,325.44 1151.8,324.44 D39.2@1200,324.44 1200,285.56 D40.2@1199.44,285
VDD_RAD: C73.2 C74.2 C75.2 C76.2 FB1.2 J1.1 R97.2 U2.11 U2.18 U2.28 | length 2495.4
  Top Layer w10: v1(1163,1121) 1168.3,1115.7 U2.18@1236.61,1115.7 ; C73.2@1288,918 1321.26,951.26 U2.28@1321.26,972 ; C76.2@1334.56,1263 1360.63,1236.93 U2.11@1360.63,1160.98
  Top Layer w12: R97.2@1112.56,1247 1104.56,1239 C75.2@1104.56,1163 1104.56,1153.44 1137,1121 v1(1163,1121) ; R97.2@1117.56,1247 1117.56,1257.56 1179,1319 1295,1319 1334.56,1279.44 C76.2@1334.56,1263 ; v1(1156,987) 1176,967 FB1.2@1176,914.56 ; FB1.2@1182.44,915.56 C74.2@1229,915.56 ; C74.2@1234,920.56 C74.2@1229,915.56 ; C73.2@1288,918 1285.56,915.56 C73.2@1284,915.56 C74.2@1235,915.56 C74.2@1229,915.56
  Signal w12: v1@1163,1119 1163,994 v1(1156,987) 1304,839 1461,839 1530,770 1595,770 1675,690 1675,302.24 1657.76,285 1512.7,285 1485.7,258 1417,258 1376,217 1376,174 J1.1@1410,140
VDD_RAD_FLT: C72.2 FB1.1 U19.1 | length 82.4
  Top Layer w12: C72.2@1140.56,859 1175.56,859 FB1.1@1176,859.44 ; FB1.1@1188,854.44 FB1.1@1189,855.44 ; FB1.1@1188,858.44 1196.6,849.84 U19.1@1196.6,816.59
VDD_RAD_SUP: C71.2 P2.8 U19.4 | length 359.2
  Top Layer w10: P2.8@1015,822 1019.4,817.6 1030.4,817.6 1076,772 1139,772 1166,745 1242,745 1264.41,767.41 C71.2@1333,767.44
VDD_SEN: C57.2 C69.2 P4.3 P4.5 P4.7 P4.11 P5.4 R87.2 R94.2 R95.2 U12.1 U17.2 U17.8 | length 1177.4
  Top Layer w8: R87.2@671,385.44 R87.2@677.06,391.5 ; 681,331 cw(c672,322) 681,313 cw(c690,306.16) 696.84,315.16 ; U12.1@794.41,421.41 U12.1@797.4,421.41
  Top Layer w10: U17.8@598.98,295.47 663.47,295.47 690,322 ; R87.2@679.44,377 681,375.44 681,331 690,322 ; R95.2@777.44,315.16 U17.2@721.02,315.16 696.84,315.16 690,322 ; U12.1@795.4,423.41 U12.1@797.49,423.31 ; R94.2@828,307.44 828,192 872,148 887,148 935,100 P4.11@1035,100 1068,67 1108,67 1135,94 P4.7@1135,100 P4.5@1185,100 P4.3@1235,100
  Top Layer w12: R87.2@677.06,391.5 764.5,391.5 U12.1@794.41,421.41 ; R95.2@784,313.44 R94.2@828,313.44 ; U12.1@797.4,421.41 838.85,421.41 C57.2@843.44,426
  Top Layer w14: C69.2@758.56,254 777.44,272.88 R95.2@777.44,307.44
VDD_SENSE_SUP: C56.2 P2.4 R87.1 U12.4 | length 646.1
  Top Layer w12: R87.1@671,440.56 685,454.56 685,472 ; U12.4@722.6,472.59 685.59,472.59 685,472 ; P2.4@1025.4,720.6 1038.4,720.6 1062,697 1062,655.66 1036.34,630 984,630 925,571 732.44,571 C56.2@723,561.56 685,523.56 685,472
VDD_SW_0: D4.2 D12.2 D16.2 R4.2 R8.2 R16.2 | length 427.4
  Bottom Layer w10: R16.2@1517.44,1808 1530,1795.44 1530,1733 1561,1702 R8.2@1561,1677.56 ; R16.2@1517.44,1814 1517.44,1851.88 D16.2@1523,1857.44
  Bottom Layer w12: R8.2@1546,1674 1535,1674 1508,1647 1508,1560 1538.56,1529.44 R4.2@1560,1529.44 1561,1528.44 D4.2@1561,1497.52
VDD_SW_1: D3.2 D11.2 D15.2 R3.2 R7.2 R15.2 | length 457.1
  Bottom Layer w10: D15.2@1227,1863.44 1223.44,1859.88 R15.2@1223.44,1819 1230,1812.44 1230,1802 1236,1796 1236,1795.79 1239,1792.79 1239,1743.44 1269,1713.44 1269,1688.56 1270,1687.56 1246.56,1687.56 1213,1654 1213,1574 1252.56,1534.44 1269,1534.44 1266,1531.44 D3.2@1266,1498.56
VDD_SW_2: D2.2 D10.2 D14.2 R2.2 R6.2 R14.2 | length 448.1
  Bottom Layer w10: D14.2@926,1859.44 927.44,1858 R14.2@927.44,1816 ; R14.2@927.44,1808 940,1795.44 940,1735 970,1705 970,1685.56 R6.2@967,1682.56 941,1682.56 911,1652.56 911,1564 939.56,1535.44 R2.2@964,1535.44 969,1530.44 D2.2@969,1499.56
VDD_SW_3: D1.2 D9.2 D13.2 R1.2 R5.2 R13.2 | length 415.2
  Bottom Layer w10: D13.2@627,1858.44 627.44,1858 R13.2@627.44,1808 627.44,1754 667,1714.44 667,1687.56 668,1686.56 661.56,1686.56 641,1666 641,1554.44 671,1524.44 D1.2@671,1487.56
VHarvest: D28.2 P1.2 P1.4 P1.6 P1.8 P8.4 R48.1 R49.2 | length 932.6
  Bottom Layer w8: P8.4@105,746 75,776 75,1003 166,1094 166,1115 194,1143 D28.2@194,1221.83 ; 253,1250 P1.2@275,1250
  Bottom Layer w14: D28.2@194,1221.83 221.17,1249 277,1249 250.44,1222.44 R48.1@250.44,1181 250.44,1134 R49.2@248.44,1132 ; P1.2@286,1250 P1.8@436,1250
VHarvest_EXT: P1.1 P11.2 | length 471.6
  Top Layer w14: P11.2@105,1650 144,1611 144,1346 189,1301 274,1301 P1.1@275,1300 ; P1.1@285,1301 P1.1@286,1300
VHarvest_RF: C93.1 D37.2 P1.3 | length 664
  Top Layer w10.42: D37.2@372.69,1799.74 D37.2@378.59,1805.65
  Top Layer w20.2: P1.3@325,1300 325,1329 225.9,1428.1 225.9,1685.9 270,1730 348,1730 372.69,1754.69 C93.1@372.69,1764 378.59,1769.91 D37.2@378.59,1805.65
VHarvest_SOL: P1.5 R41.2 R42.2 | length 652
  Top Layer w16: P1.5@375,1300 375,1321 573,1519 573,1706 624,1757 666.44,1757 666.44,1805 R41.2@667.44,1806
VIN: P1.7 P1.9 P1.10 P1.13 P1.20 | length 537.3
  Signal w14: P1.10@477,1249 477,1240 505,1212 703,1212 727,1236 P1.20@727,1249 ; P1.9@477,1299 477,1308 506,1337 551,1337 577,1311 P1.13@577,1299
  Bottom Layer w16: P1.7@427,1299 477,1299 P1.10@477,1249
VLTCH_0: C25.2 D7.2 Q8.1 Q12.3 R12.2 R20.2 R132.2 | length 340.5
  Bottom Layer w12: Q12.3@1653,1495.29 1653.42,1495.71 1712.85,1495.71 1741,1467.56 1748,1474.56 D7.2@1748,1498.44 ; 1744,1680.56 1743,1681.56 1743,1666.56 R12.2@1748,1661.56 ; R12.2@1745.22,1667.78 1783,1630 1783,1537 D7.2@1756.87,1510.87
VLTCH_1: C24.2 D8.2 Q7.1 Q11.3 R11.2 R19.2 R135.2 | length 363.1
  Bottom Layer w10: Q11.3@1359,1492.29 1390.98,1492.29 1397.4,1498.71 1424.55,1471.56 C24.2@1451,1471.56 1449,1473.56 1449,1508 1486,1545 1486,1626 1453,1659 1453,1690.44 R19.2@1447,1696.44
VLTCH_2: C23.2 D6.2 Q6.1 Q10.3 R10.2 R18.2 R134.2 | length 340.5
  Bottom Layer w10: Q10.3@1059,1492.29 1060.42,1493.71 Q6.1@1096.4,1493.71 1112.55,1477.56 1146,1477.56 1152,1483.56 D6.2@1152,1510.88 1188,1546.88 1188,1629.56 R10.2@1152,1665.56 R18.2@1152,1691.44
VLTCH_3: C22.2 D5.2 Q5.1 Q9.3 R9.2 R17.2 R133.2 | length 344.2
  Bottom Layer w10: Q9.3@759,1492.29 760.42,1493.71 Q5.1@798.4,1493.71 ; Q5.1@796,1478.56 841,1478.56 852,1489.56 852,1509 893,1550 893,1632 R9.2@852,1673 ; R17.2@852,1694.44 R9.2@852,1673 ; R9.2@853,1668.56 852,1669.56 R9.2@852,1673
VSTOR: C34.2 C35.2 D25.2 R58.1 U7.5 U7.15 | length 714.4
  Bottom Layer w8: U7.5@611.59,803.65 676.65,803.65 688,815 688,855 707,874 707,917 672.44,951.56 R58.1@642,951.56
  Bottom Layer w10: C34.2@426,869.44 464,907.44 508.44,907.44 519,918 519,970 527,978 615.56,978 R58.1@642,951.56 ; C35.2@443.56,809 468.6,783.96 U7.15@501.35,783.96
  Bottom Layer w12: C34.2@426,869.44 436,869.44 443.56,861.88 C35.2@443.56,809
pads on no net: J1.7 U2.3 U2.22 U2.25 U2.26 U2.27 U4.4 U4.5 U5.6 U6.3 U8.3 U9.3 U11.3 U12.6 U13.6 U15.3 U15.5 U15.6 U15.7 U15.14 U18.10 U18.11 U19.6 U27.3

## Polygon pours and split planes (outlines as drawn)
GND on GND "GND" (solid, pour order 18): 0,2270 1978,2270 1978,0 0,0
GND on Top Layer "GND" (solid, pour order 14): 509.63,2252.87 586.97,2252.87 599,2252.87 599,1462 509.63,1462
GND on Top Layer "GND" (solid, pour order 4): 1977.95,20 1609,20 1609,1309.86 1757,1491.84 1757,1807 1977.94,1807
GND on Top Layer "GND" (solid, pour order 12): 247,2255 511,2254 511,2071 224,2071 224,1579.79 20,1579.79 20,2254 21,2255
GND on Top Layer "GND" (solid, pour order 10): 584,2255 1930,2255 1930,2065 584,2065

## Keep-outs
Keep-Out Layer:
  the board outline again, w32

## Other copper
Top Layer:
  rectangle net GND: 1866,808 1978,955.07
  rectangle net GND: 1542,901 1616.99,965
  pour cut-out: 1939,948 1899,948 1855.96,991.04 1939,991.04
  pour cut-out: 1574,1213 1651.64,1213 1651.64,1075 1574,1075

## Silkscreen, mask and mechanical layers (free items; w line width, h text height)
Top Overlay:
  drawing of 3044 lines, arcs and shapes, not listed
  text "BNK>BPS" at 593,2212 h22 r270
  text "IN>BQ" at 559,2209 h22 r270
  text "BQ>CIN" at 806,2209 h22 r270
  text "IN>CIN" at 731,2205 h22 r270
  text "BQ>BP" at 768,2205 h22 r270
  text "LD>BPE" at 698,2204 h22 r270
  text "B1" at 21,2199 h22
  text "B2" at 20,2152.25 h22
  text "B3" at 20,2095.03 h22
  text "B4" at 20,2045.03 h22
  text "CAPybara v2.0" at 2109,1927 h40 r270
  text "Abstract Lab / ER AC BL 2018" at 1908,1796 h32 r270
  text "http://intermittent.systems" at 1858,1793 h28 r270
  text "GD" at 22,1693 h22
  text "VE" at 20,1613 h22
  text "GD" at 15,1538 h22
  text "RS" at 16,1489 h22
  text "BNK<BQ" at 506,1472 h22 r270
  text "TS" at 15,1439 h22
  text "IN-IN" at 464.69,1438.69 h22 r270
  text "IN<H" at 415,1431 h22 r270
  text "EXT" at 256,1409 h22 r270
  text "SOL" at 363,1402 h22 r270
  text "VD" at 17,1389 h22
  text "RF" at 310,1385 h22 r270
  text "GND" at 1665,1236 h22 r270
  text "2" at 1506,1235 h22 r270
  text "0" at 1605,1235 h22 r270
  text "3" at 1452,1233 h22 r270
  text "1" at 1549,1232 h22 r270
  text "4" at 1402,1231 h22 r270
  text "GND" at 23,1200 h22
  text "SCL" at 24,1149 h22
  text "SDA" at 23,1094 h22
  text "GND" at 60,1000 h22 r270
  text "VDD" at 93,1000 h22 r270
  text "CAP>BNK" at 786,998 h22
  text "TX" at 418,966 h22 r270
  text "BQO" at 515,966 h22 r270
  text "AX1" at 322,965 h22 r270
  text "AX0" at 370,963 h22 r270
  text "RX" at 475,962 h22 r270
  text "LD<BNK" at 794,962 h22
  text "AX2" at 282,961 h22 r270
  text "CIN>BNK" at 753,898 h22
  text "A3" at 14,887 h24
  text "BNK>BST" at 752,863 h22
  text "TX" at 17,835 h22
  text "LD>RAD" at 747,818 h22
  text "RX" at 18,787 h22
  text "LD>MCU" at 745,770 h22
  text "VH" at 16,735 h22
  text "LD>SEN" at 745,707 h22
  text "VB" at 16,686 h22
  text "LD<BST" at 744,674 h22
  text "FI" at 1693,662 h22
  text "A4" at 16,635 h22
  text "FR" at 1694,611 h22
  text "A5" at 15,584 h22
  text "LS1" at 1692,564 h22
  text "LS2" at 1693,516 h22
  text "HM" at 1690,460 h22
  text "BI" at 25,445 h22
  text "AP" at 1692,413 h22
  text "35" at 18,391 h22
  text "LP" at 1694,366 h22
  text "OK" at 18,340 h22
  text "GD" at 1693,314 h22
  text "GD" at 18,288 h22
  text "GD" at 309,54 h22 r270
  text "VB" at 356,54 h22 r270
  text "CO" at 461,53 h22 r270
  text "VT" at 662,53 h22 r270
  text "GD" at 1278,53 h22 r270
  text "BO" at 411,52 h22 r270
  text "BP" at 561,52 h22 r270
  text "BE" at 613,52 h22 r270
  text "VD" at 511,51 h22 r270
  text "SD" at 819,51 h22 r270
  text "VS" at 923,51 h22 r270
  text "AP" at 1029,51 h22 r270
  text "AL" at 1084,51 h22 r270
  text "LS" at 1132,51 h22 r270
  text "HM" at 1183,51 h22 r270
  text "GD" at 767,50 h22 r270
  text "SC" at 871,50 h22 r270
  text "LP" at 1230,49 h22 r270
Mechanical 4:
  the board outline again, w10
Mechanical 14:
  lines w15.75: 123,113 123,1884.65 1894.65,1884.65 1894.65,113 123,113